# EAGLE board Kombisensor_UP_BA (EAGLE 5.00)
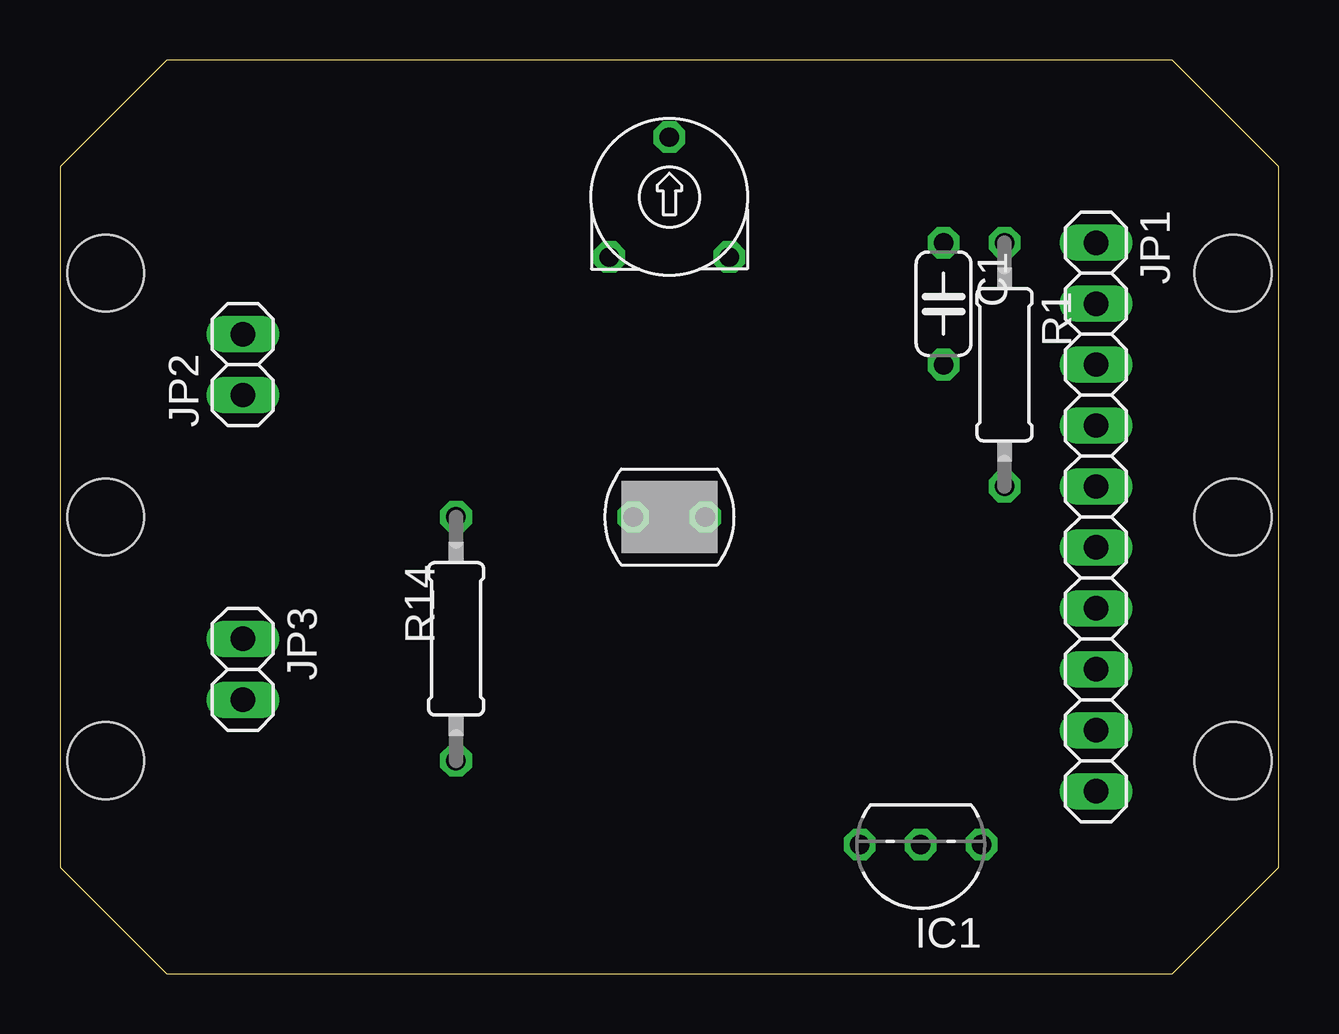
[diagram p0: board, top side]
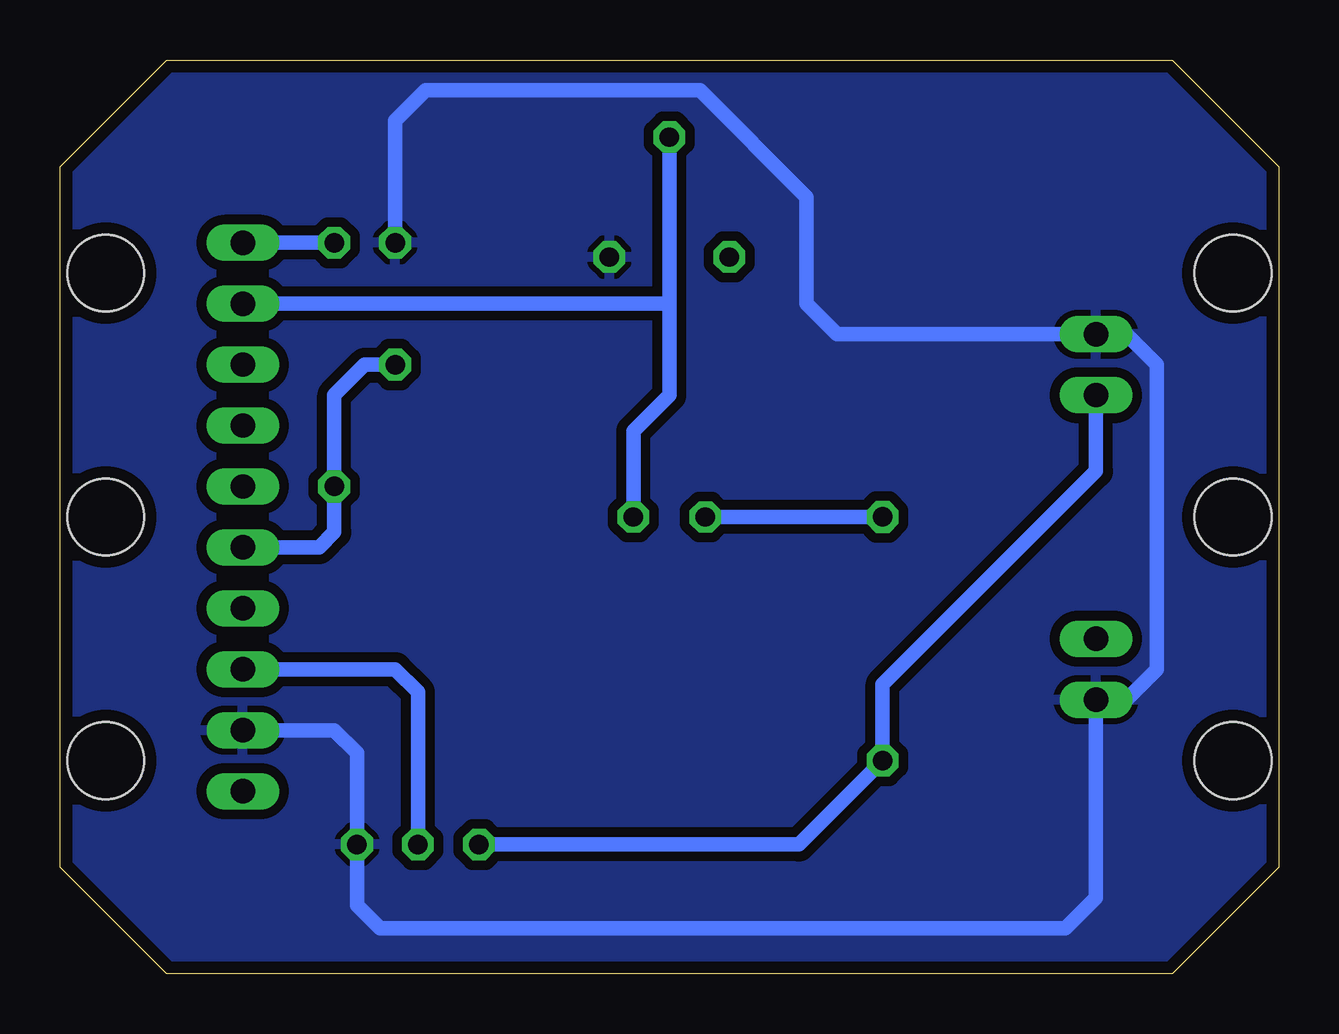
[diagram p1: board, bottom side, seen from below]

Size 50.8 x 38.1 mm. Coordinates in mm from the lower left corner, seen from the top.
Outline: 0,4.45 4.45,0 46.35,0 50.8,4.45 50.8,33.66 46.35,38.1 4.45,38.1 0,33.66 0,4.45
Copper layers (1*16): Top 0.035mm / dielectric 1.5mm / Bottom 0.035mm
Design rules "default *": minimum track width 10mil, minimum drill 24mil, track to track 16mil, track to pad 16mil, pad to pad 16mil, via to via 16mil, smd to smd 8mil, copper to edge 20mil, drill to drill 8mil, minimum pad ring 10mil, minimum via ring 8mil, stop-mask expansion 4mil, vias tented up to drill 0mil, thermal gap 10mil
Holes 3.2 mm at 1.91,19.05 1.91,29.21 1.91,8.89 48.9,19.05 48.9,29.21 48.9,8.89

## Footprints (pad centres in the part's own frame; a part is rotated, then mirrored left to right if it is on the bottom)
C050-024X044 = drill 0.813 octagon: 1 -2.54,0; 2 2.54,0
TO92- = drill 0.813 octagon: 1 -2.54,0; 2 0,0; 3 2.54,0
1X10 = drill 1.016 long: 1 -11.43,0; 2 -8.89,0; 3 -6.35,0; 4 -3.81,0; 5 -1.27,0; 6 1.27,0; 7 3.81,0; 8 6.35,0; 9 8.89,0; 10 11.43,0
1X02 = drill 1.016 long: 1 -1.27,0; 2 1.27,0
LDR07 = drill 0.8 octagon: P$1 -1.5,0; P$2 1.5,0
0207/10@1 = drill 0.813 octagon: 1 -5.08,0; 2 5.08,0
PT6L = drill 0.8 octagon: A 2.5,2.5; E 2.5,-2.5; S -2.5,0

## Placement (x,y rotation side)
C1  100n  [C050-024X044]  36.83,27.94 270 top
IC1  DS18B20  [TO92-]  35.88,5.4 180 top
JP1  [1X10]  43.18,19.05 270 top
JP2  [1X02]  7.62,25.4 90 top
JP3  [1X02]  7.62,12.7 270 top
LDR1  LDR07  [LDR07]  25.4,19.05 0 top
R1  100k  [0207/10@1]  39.37,25.4 270 top
R2  500  [PT6L]  25.4,32.38 270 top
R14  180  [0207/10@1]  16.51,13.97 90 top

## Library data of the parts
C1 R1 R14 = rcl
IC1 = 1wire
JP1-JP3 = pinhead
LDR1 = ldr
R2 = kubi

## Nets
1W: IC1.2 JP1.8
GND: C1.1 IC1.1 JP1.9 JP2.2 JP3.2 R2.A
N$1: C1.2 JP1.6 R1.2
N$2: JP1.2 LDR1.P$2 R2.S
N$3: JP1.1 R1.1
N$4: LDR1.P$1 R14.2
VCC: IC1.3 JP2.1 R14.1

## Tracks (layer width: path | path; a pad name or v marks a point on that pad's centre or on a via)
1W
  Bottom 0.61: IC1.2 35.88,11.75 36.83,12.7 JP1.8
GND
  Bottom 0.61: JP1.9 39.37,10.16 38.42,9.21 IC1.1 38.42,2.86 37.47,1.91 8.89,1.91 7.62,3.17 JP3.2 6.35,11.43 5.08,12.7 5.08,25.4 6.35,26.67 JP2.2 18.41,26.67 19.68,27.94 19.68,32.38 24.13,36.83 35.56,36.83 36.83,35.56 C1.1
  pour Bottom: 0,4.45 0,33.66 4.45,38.1 46.35,38.1 50.8,33.66 50.8,4.45 46.35,0 4.45,0
N$1
  Bottom 0.61: JP1.6 40.01,17.78 39.37,18.41 R1.2 39.37,24.13 38.1,25.4 C1.2
N$2
  Bottom 0.61: 25.4,27.94 25.4,24.13 26.9,22.63 LDR1.P$2 | 25.4,27.94 JP1.2 | 25.4,34.92 R2.S 25.4,27.94
N$3
  Bottom 0.61: R1.1 JP1.1
N$4
  Bottom 0.61: R14.2 LDR1.P$1
VCC
  Bottom 0.61: JP2.1 7.62,20.95 16.51,12.06 R14.1 20,5.4 IC1.3